# Altium PCB BEAGLEPLAYV020_220915.brd.PcbDoc (part 10 of 12)
Units mil, origin at the board's own origin, x right, y up, seen from the top; angles counter-clockwise.
Board outline 3149.7 x 3149.7 mil, 8 copper layers (TOP, LYR2_GND, LYR3, LAY4_PWR1, LAY5_PWR2, LAY6, LYR7_GND, BOTTOM), stack 60.84 mil thick; 782 components, 546 nets, 2864 pads, 2056 vias.
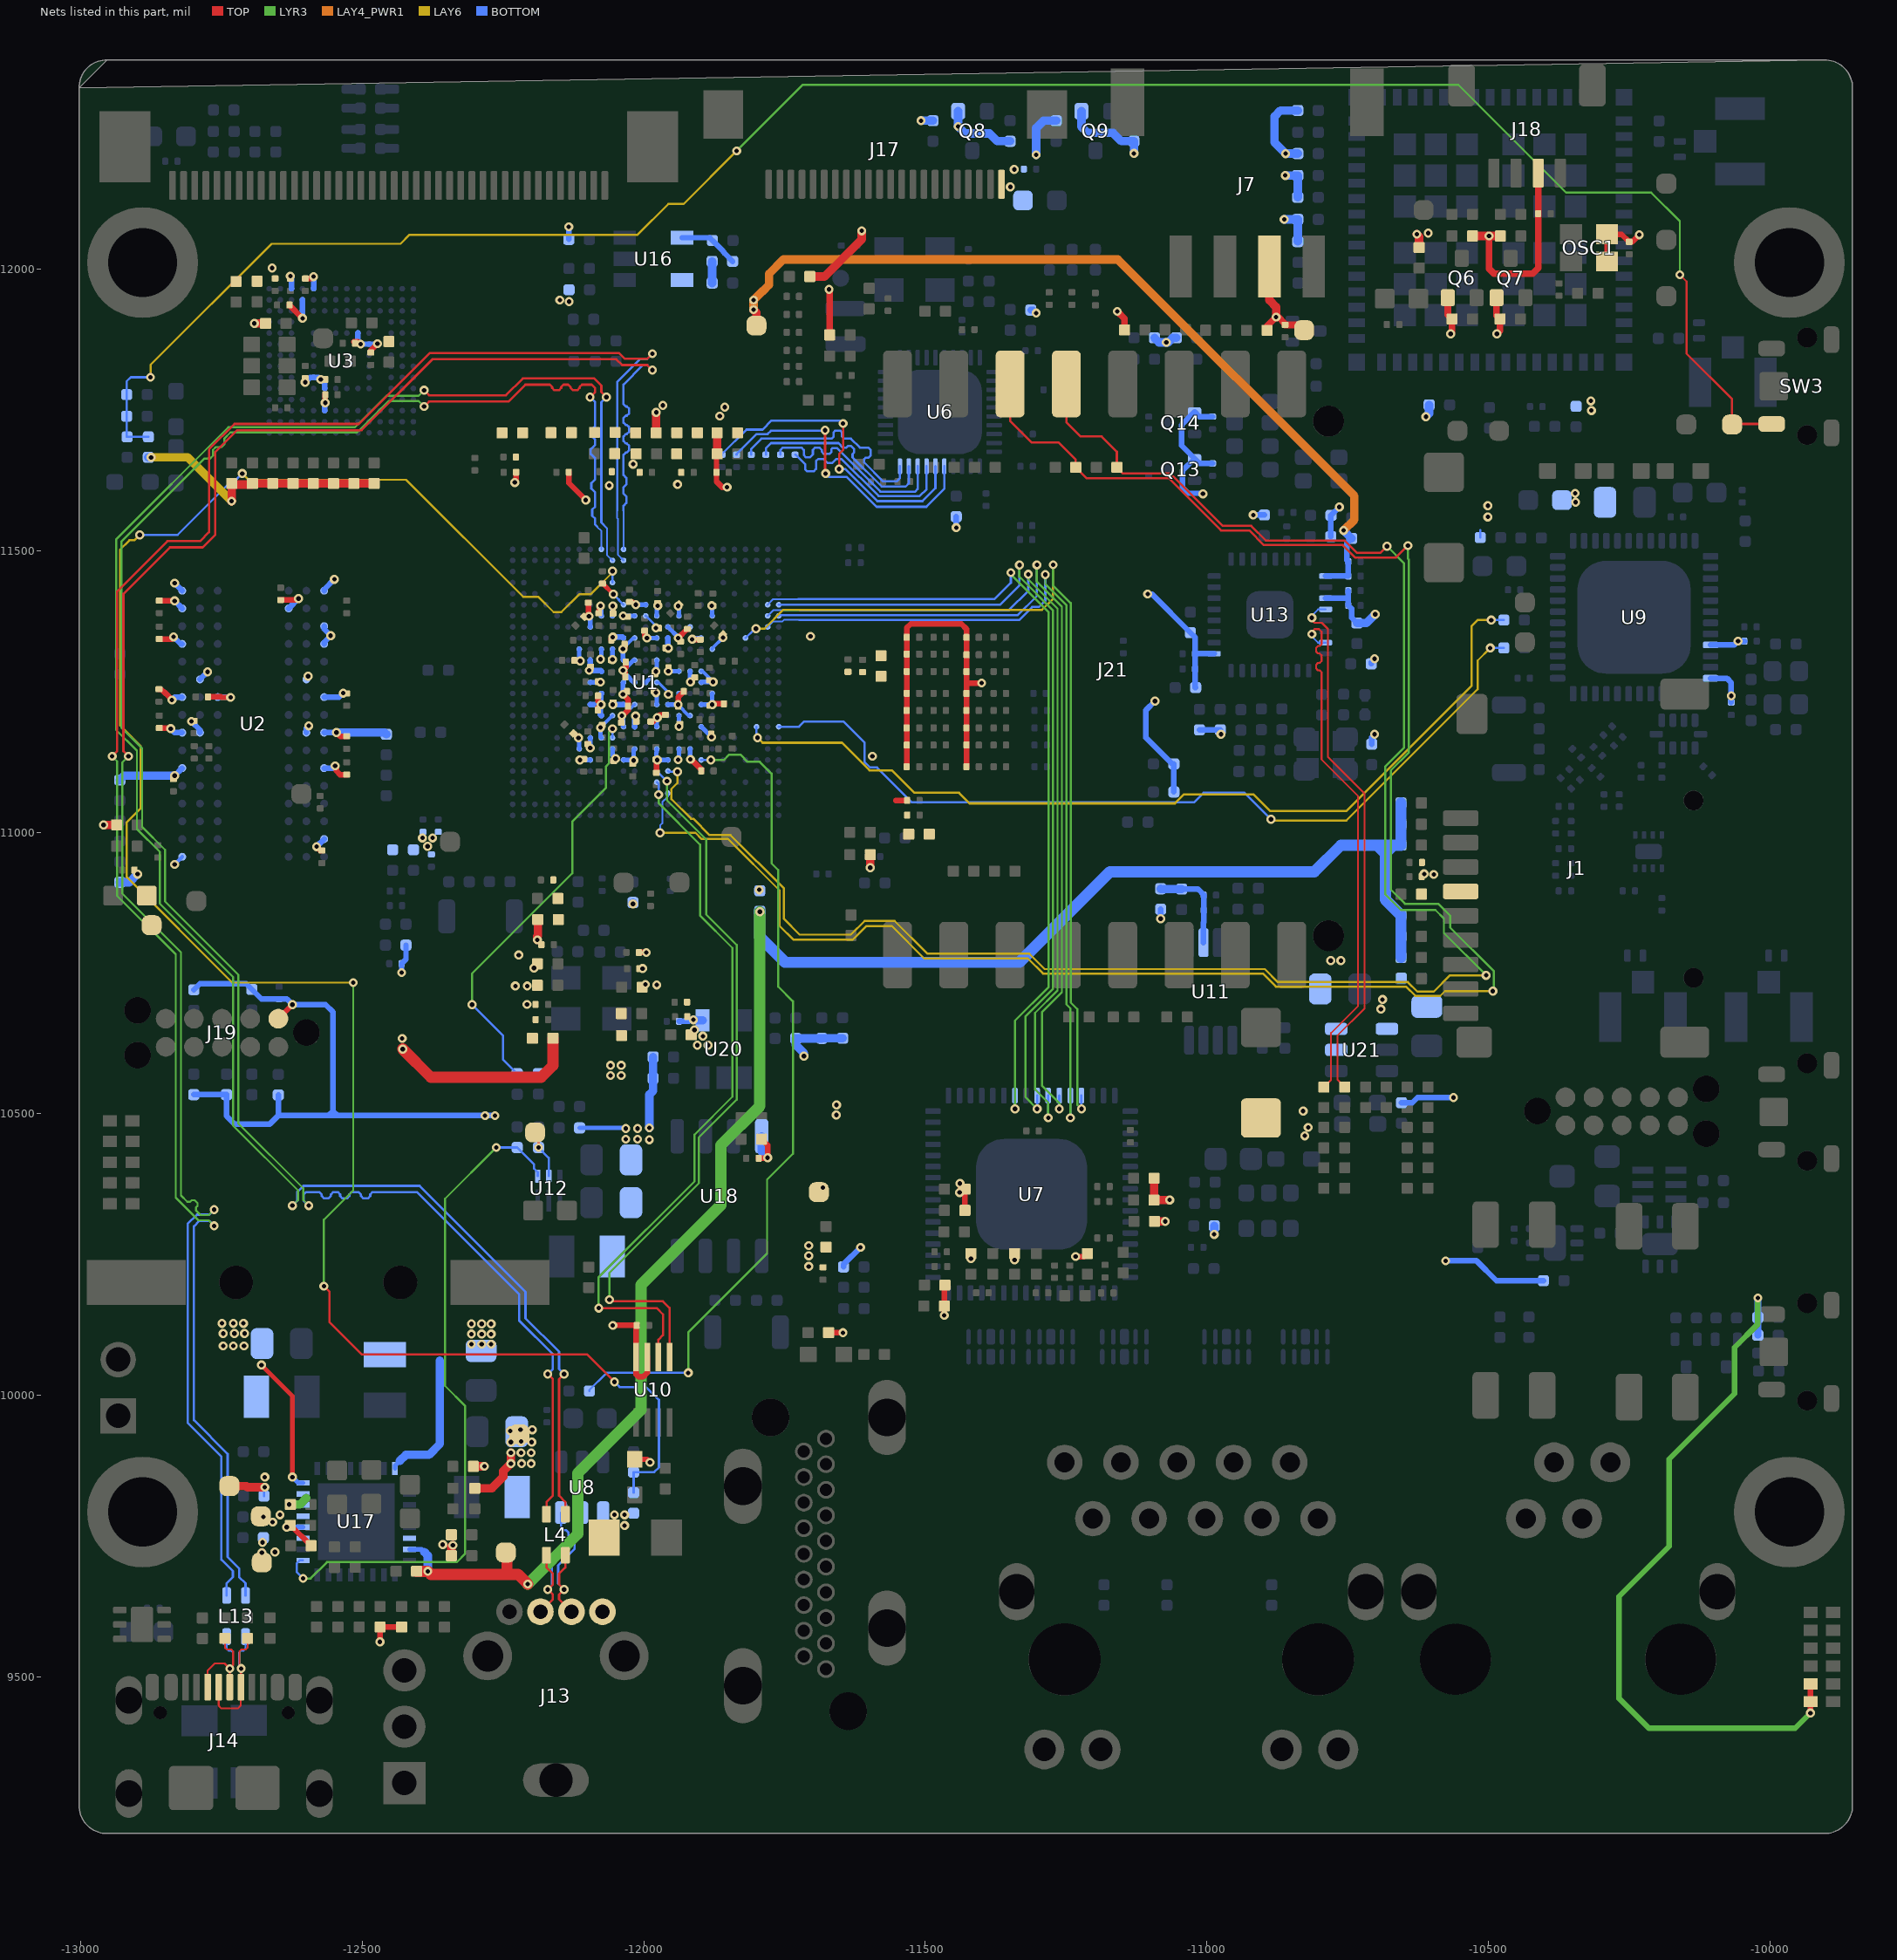
[diagram p16: the nets of this part, all layers, seen from the top]

## Via types
v1: diameter 16/0/16/0/0/0/0/16 (per signal layer), hole 8, TOP to BOTTOM, 334 vias
v2: diameter 16/16/0/0/0/0/16/16 (per signal layer), hole 8, TOP to BOTTOM, 282 vias
v3: diameter 16/0/0/0/0/16/0/16 (per signal layer), hole 8, TOP to BOTTOM, 255 vias
v4: diameter 16/16/0/0/0/16/16/16 (per signal layer), hole 8, TOP to BOTTOM, 253 vias
v5: diameter 16, hole 8, TOP to BOTTOM, 212 vias
v6: diameter 16/16/16/0/0/16/16/16 (per signal layer), hole 8, TOP to BOTTOM, 173 vias
v7: diameter 16/0/0/16/0/0/0/16 (per signal layer), hole 8, TOP to BOTTOM, 131 vias
v8: diameter 16/0/0/0/16/0/0/16 (per signal layer), hole 8, TOP to BOTTOM, 98 vias
v9: diameter 16/16/0/16/0/0/16/16 (per signal layer), hole 8, TOP to BOTTOM, 93 vias
v10: diameter 16/0/16/0/0/16/0/16 (per signal layer), hole 8, TOP to BOTTOM, 87 vias
v11: diameter 16/16/0/16/0/16/16/16 (per signal layer), hole 8, TOP to BOTTOM, 44 vias
v12: diameter 16/16/16/16/0/16/16/16 (per signal layer), hole 8, TOP to BOTTOM, 40 vias
v13: diameter 16/16/16/0/0/0/16/16 (per signal layer), hole 8, TOP to BOTTOM, 19 vias
v14: diameter 16/0/0/16/0/16/0/16 (per signal layer), hole 8, TOP to BOTTOM, 15 vias
v15: diameter 16/0/0/0/16/16/0/16 (per signal layer), hole 8, TOP to BOTTOM, 13 vias
v16: diameter 16/0/16/0/16/0/0/16 (per signal layer), hole 8, TOP to BOTTOM, 3 vias
v17: diameter 16/0/16/16/0/0/0/16 (per signal layer), hole 8, TOP to BOTTOM, 3 vias
v18: diameter 16/16/16/16/0/0/16/16 (per signal layer), hole 8, TOP to BOTTOM, 1 vias

## Nets (pads, with @x,y where several pads share a name; then routed paths per layer and width w, separated by ;. In a path a pad name is that pad's centre, name@x,y a point inside that pad or via, vN(x,y) a via of type N, cw(c..) or ccw(c..) an arc to the next point about the centre after c; other vN are vias at no path point) (continued)
TX_N: R101.1 U13.7 | length 942.3
  TOP w3.3: v5(-10813.48,11351.8) -10813.48,11355.8 -10808.63,11360.65 -10800.64,11360.65 -10796.3,11356.31 -10796.3,11334.01 -10799.6,11330.71 -10802.7,11330.71 -10806,11327.41 -10806,11320.81 -10802.7,11317.51 -10799.6,11317.51 -10796.3,11314.21 -10796.3,11303.97 -10799.6,11300.67 -10802.7,11300.67 -10806,11297.37 -10806,11290.77 -10802.7,11287.47 -10799.6,11287.47 -10796.3,11284.17 -10796.3,11129.31 -10731.3,11064.31 -10731.3,10691.69 -10779.39,10643.6 -10779.39,10570.38 ; R101.1@-10792.14,10547.53 -10779.36,10560.39 -10779.38,10570.37
  BOTTOM w3.3: v5(-10813.48,11351.8) -10813.48,11347.8 -10802.43,11336.75 U13.7@-10789,11336.75
TX_P: R100.1 U13.4 | length 937.7
  TOP w3.3: v5(-10813.48,11380.8) -10813.48,11376.8 -10808.63,11371.95 -10795.95,11371.95 -10785,11361 -10785,11134 -10720,11069 -10720,10687 -10768.09,10638.91 -10768.09,10575.38 -10768.06,10560.48 R100.1@-10755.14,10547.65
  BOTTOM w3.3: v5(-10813.48,11380.8) -10813.48,11384.8 -10802.43,11395.85 U13.4@-10789,11395.85
TXC: R49.2 U6.20 | length 389.7
  BOTTOM w4: R49.2@-11809.14,11670.46 -11809.14,11680.86 -11791,11699 -11666,11699 -11663,11702 -11663,11710 -11660.16,11712.84 -11650.84,11712.84 -11648,11710 -11648,11703 -11644,11699 -11632,11699 -11616,11683 -11601,11683 -11597,11679 -11597,11669 -11601,11665 -11606,11665 -11608.67,11662.33 -11608.67,11656.67 -11575,11623 -11551,11623 -11545,11629 U6.20@-11545,11649.96
TXCTL: R50.2 U6.19 | length 348.7
  BOTTOM w4: R50.2@-11783.14,11670.46 -11783.14,11681.86 -11774,11691 -11654.32,11691 -11646.15,11682.83 -11640.49,11682.83 -11637.49,11685.83 -11631.83,11685.83 -11626.17,11680.17 -11626.17,11674.51 -11629.17,11671.51 -11629.17,11665.85 -11577.32,11614 -11535,11614 -11529.25,11619.75 U6.19@-11529.25,11649.96
TXD0: R51.2 U6.18 | length 365.8
  BOTTOM w4: R51.2@-11757.14,11670.46 -11757.14,11679 -11753.14,11683 -11719.72,11683 -11715.72,11679 -11715.72,11669.84 -11711.71,11665.83 -11704.89,11665.83 -11699.72,11671 -11699.72,11679 -11695.72,11683 -11687.96,11683 -11684,11679.04 -11684,11676 -11680,11672 -11670,11672 -11667,11675 -11667,11680.04 -11665.04,11682 -11656.64,11682 -11579.64,11605 -11518,11605 -11513.5,11609.5 U6.18@-11513.5,11649.96
TXD1: R52.2 U6.17 | length 347.3
  BOTTOM w4: R52.2@-11731.14,11670.46 -11730.14,11670.46 -11713,11653.32 -11713,11644 -11710,11641 -11698,11641 -11694,11645 -11694,11659 -11690,11663 -11681,11663 -11674,11656 -11665,11656 -11658,11663 -11648.96,11663 -11582.96,11597 -11510,11597 -11497.75,11609.25 U6.17@-11497.75,11649.96
TXD2: R57.2 U6.16 | length 569.9
  TOP w4: v5(-11653,11645) -11653,11672 -11646,11679 v5(-11646,11726)
  BOTTOM w4: R57.2@-11861.14,11670.46 -11861.14,11671.46 -11817.6,11715 -11789,11715 -11773,11731 -11651,11731 v5(-11646,11726) ; v5(-11653,11645) -11642.28,11645 -11585.28,11588 -11505,11588 -11482,11611 U6.16@-11482,11649.96
TXD3: R58.2 U6.15 | length 541.7
  TOP w4: v5(-11678,11714) -11678,11638 v5(-11677,11637)
  BOTTOM w4: R58.2@-11835.14,11670.46 -11835.14,11671.46 -11799.6,11707 -11780,11707 -11774,11713 -11679,11713 v5(-11678,11714) ; v5(-11677,11637) -11671,11631 -11639.6,11631 -11586.6,11578 -11498.12,11578 -11466.26,11609.86 U6.15@-11466.26,11649.96
U18_FB: R211.2 R212.1 U16.4 | length 107.5
  BOTTOM w10: U16.4@-11931.84,12055.86 -11882.99,12055.86 R212.1@-11877.97,12050.84 -11877.84,12050.84 -11860,12033 -11855.71,12027.4 R211.2@-11842.15,12013.84
UART0_RXD: U1.D14 U10.6 | length 1285.7
  TOP w4: v1(-12080,10155) -11977,10155 -11966,10144 -11966,10107 -11974.08,10098.92 U10.6@-11974.08,10068.16
  LYR3 w3.8: v1(-12080,10155) -12080,10210 -11910,10380 -11910,10463 -11842.6,10530.4 -11842.6,10794.6 -11900,10852 -11900,10978.18 -11973.63,11051.81 v1(-11973.63,11066.7)
  BOTTOM w4: U1.D14@-11976.82,11089.04 -11973.63,11085.85 v1(-11973.63,11066.7)
UART0_TXD: U1.E14 U10.5 | length 1291.1
  TOP w4: v1(-12061,10170) -12058,10167 -11966,10167 -11954.38,10155.38 U10.5@-11954.38,10068.16
  LYR3 w3.8: v1(-12061,10170) -12061,10217.96 -11902.2,10376.76 -11902.2,10457.8 -11834.8,10525.2 -11834.8,10799.8 -11889,10854 -11889,10987 -11958.8,11056.8 v1(-11958.8,11090.7)
  BOTTOM w4: U1.E14@-11976.82,11108.72 v1(-11958.8,11090.7)
UART5_RXD: D38.2 J21.6 U1.C15 | length 3540.9
  TOP w4: J21.6@-11349.39,11796.09 -11349.39,11730.39 -11311,11692 -11263,11692 -11232.79,11661.79 D38.2@-11232.79,11648 -11213.79,11629 -11068,11629 -10975,11536 -10924.68,11536 -10898.68,11510 -10758.68,11510 -10736.68,11488 -10664,11488 v1(-10643,11509)
  LYR3 w3.8: v1(-10643,11509) -10643,11486 -10641,11484 -10641,11142 -10673,11110 -10673,10898 -10648,10873 -10589,10873 -10568,10852 -10568,10831 -10490.1,10753.1 -10490.1,10719.9 v10(-10492,10718)
  LAY6 w3.8: v3(-11971,10999) -11908,10999 -11897,10988 -11849.96,10988 -11758.86,10896.9 -11758.86,10833.86 -11734,10809 -11629,10809 -11605,10833 -11559,10833 -11502,10776 -11318,10776 -11291,10749 -10900.32,10749 -10877.32,10726 -10646.08,10726 -10629.48,10709.4 -10585.6,10709.4 -10577,10718 v10(-10492,10718)
  BOTTOM w3.2: v3(-11971,10999) -11971,11012 -11967,11016 -11967,11053.65 -11957.13,11063.52 U1.C15@-11957.13,11069.35
UART5_TXD: D39.2 J21.5 U1.E15 | length 3375.7
  TOP w4: J21.5@-11249.39,11796.09 -11249.39,11728.4 -11223.99,11703 -11187,11703 -11159.79,11675.79 D39.2@-11159.79,11648 -11148.79,11637 -11064.68,11637 -10971.68,11544 -10921.36,11544 -10895.36,11518 -10755.36,11518 -10733.36,11496 -10692,11496 v1(-10680,11508)
  LYR3 w3.8: v1(-10680,11508) -10650,11478 -10650,11149.96 -10683.48,11116.48 -10683.48,10890.48 -10655,10862 -10594,10862 -10579,10847 -10579,10821 v10(-10504,10746)
  LAY6 w3.8: v3(-11940.2,11107.5) -11940.2,11087.5 -11951,11076.7 -11951,11059 -11916,11024 -11912,11024 -11883,10995 -11845.92,10995 -11751.06,10900.14 -11751.06,10846.06 -11723.2,10818.2 -11632.11,10818.2 -11607.76,10842.55 -11554.55,10842.55 -11496.2,10784.2 -11315.16,10784.2 -11287.96,10757 -10897,10757 -10874,10734 -10643.04,10734 -10626.24,10717.2 -10596.8,10717.2 -10568,10746 v10(-10504,10746)
  BOTTOM w4: U1.E15@-11957.13,11108.72 -11955.91,11107.5 v3(-11940.2,11107.5)
UART6_RXD: R121.1 U1.J23 | length 1615.4
  LAY6 w4: v3(-11798,11168) -11789,11159 -11648,11159 -11599,11110 -11559.3,11110 -11519.46,11070.16 -11440.18,11070.16 -11421.32,11051.3 -11056.7,11051.3 -11041,11067 -10917,11067 -10887.5,11037.5 -10752.5,11037.5 -10529.64,11260.36 -10529.64,11366.36 -10519.16,11376.84 v3(-10495,11376.84)
  BOTTOM w4: U1.J23@-11799.65,11187.46 -11799.65,11169.65 v3(-11798,11168) ; v3(-10495,11376.84) R121.1@-10472.47,11376.84
UART6_TXD: R120.1 U1.J25 | length 1555.3
  LAY6 w3.8: v3(-10886,11023) -10884,11021 -10752,11021 -10519,11254 -10519,11305 v3(-10496.72,11327.28)
  BOTTOM w4: U1.J25@-11760.28,11187.46 -11724.35,11187.46 -11715.18,11196.63 -11645.15,11196.63 -11608,11159.48 -11608,11125.2 -11597.8,11115 -11585.78,11115 -11523.78,11053 -11023,11053 -11006,11070 -10933,11070 v3(-10886,11023) ; v3(-10496.72,11327.28) R120.1@-10472.43,11327.28
USB0_DM: L13.1 U1.AE11 | length 3574.7
  TOP w4.1: v1(-12915.2,11135) -12924.1,11143.9 -12924.1,11423.2 -12841.37,11505.93 -12783.37,11505.93 -12761,11528.3 -12761,11675.3 -12722.3,11714 -12501.3,11714 -12375.4,11839.9 -12048.6,11839.9 -12038.4,11829.7 -11993.7,11829.7 v5(-11984.8,11820.8)
  LYR3 w3.6: v1(-12915.2,11135) -12926,11124.2 -12926,10891 -12822,10787 -12822,10355.16 -12810.67,10343.83 -12805.57,10343.83 -12802.75,10346.65 -12797.65,10346.65 -12792.56,10341.56 -12792.56,10336.46 -12795.38,10333.64 -12795.38,10328.54 -12787.04,10320.2 -12772.8,10320.2 v1(-12763,10330)
  BOTTOM w3.2: -12036.1,11571.54 -12036.1,11560.38 -12035.87,11560.15 U1.AE11@-12035.87,11502.42
  BOTTOM w4.1: v1(-12763,10330) -12771.9,10321.1 -12793.6,10321.1 -12810.1,10304.6 -12810.1,9951.4 -12750.1,9891.4 -12750.1,9708.4 -12729.62,9687.92 -12729.62,9677.52 -12740.8,9666.34 L13.1@-12740.8,9644.53 ; -12036.1,11571.54 -12036.1,11579.88 -12031,11584.98 -12031,11596.28 -12036.1,11601.38 -12036.1,11612.68 -12031,11617.78 -12031,11629.08 -12036.1,11634.18 -12036.1,11670.11 -12032,11674.21 -12030.1,11674.21 -12026,11678.31 -12026,11686.51 -12030.1,11690.61 -12032,11690.61 -12036.1,11694.71 -12036.1,11702.91 -12032,11707.01 -12030.1,11707.01 -12026,11711.11 -12026,11719.31 -12030.1,11723.41 -12032,11723.41 -12036.1,11727.51 -12036.1,11735.71 -12032,11739.81 -12030.1,11739.81 -12026,11743.91 -12026,11752.11 -12030.1,11756.21 -12032,11756.21 -12036.1,11760.31 -12036.1,11795.2 -12001.6,11829.7 -11993.7,11829.7 v5(-11984.8,11820.8)
USB0_DP: L13.4 U1.AD11 | length 3577.8
  TOP w4.1: v1(-12944.1,11135) -12935.2,11143.9 -12935.2,11427.8 -12845.97,11517.03 -12787.97,11517.03 -12772.1,11532.9 -12772.1,11679.9 -12726.9,11725.1 -12505.9,11725.1 -12380,11851 -12044,11851 -12033.8,11840.8 -11993.7,11840.8 v5(-11984.8,11849.7)
  LYR3 w3.6: v1(-12944.1,11135) -12935.3,11126.2 -12935.3,10887.14 -12831.3,10783.14 -12831.3,10351.3 -12790.9,10310.9 -12772.8,10310.9 v1(-12763,10301.1)
  BOTTOM w3.2: -12047.2,11571.54 -12047.2,11557.71 -12045.76,11556.26 -12045.76,11492.63 U1.AD11@-12035.87,11482.74
  BOTTOM w4.1: v1(-12763,10301.1) -12771.9,10310 -12789,10310 -12799,10300 -12799,9956 -12739,9896 -12739,9713 -12718.52,9692.52 -12718.52,9677.52 -12707.34,9666.34 L13.4@-12707.34,9644.53 ; -12047.2,11571.54 -12047.2,11799.8 -12006.2,11840.8 -11993.7,11840.8 v5(-11984.8,11849.7)
USB1_DM: L4.1 U1.AD10 | length 3586.8
  TOP w4.1: v1(-12390,11784.9) -12381.1,11776 -12245,11776 -12215,11806 -12088,11806 -12075.35,11793.35 -12075.35,11781.6 v5(-12066.45,11772.7) ; v5(-12141.55,10038) -12150.45,10029.1 -12150.45,9822.09 -12139.27,9810.91 L4.1@-12139.27,9789.1
  LYR3 w3.6: v1(-12623.9,10337) -12614.1,10346.8 -12614.1,10363.94 -12729.3,10479.14 -12729.3,10743.14 -12859.3,10873.14 -12859.3,10965.14 -12900,11005.84 -12900,11144.84 -12937.1,11181.94 -12937.1,11520.06 -12737.86,11719.3 -12512.86,11719.3 -12457.06,11775.1 -12399.8,11775.1 v1(-12390,11784.9)
  BOTTOM w3.2: -12075.35,11550.05 -12065.36,11540.06 -12065.36,11492.54 U1.AD10@-12055.56,11482.74
  BOTTOM w4.1: v1(-12623.9,10337) -12615,10345.9 -12615,10361.4 -12604.4,10372 -12398,10372 -12210,10184 -12210,10137 -12150.45,10077.45 -12150.45,10046.9 v5(-12141.55,10038) ; -12075.35,11550.05 -12075.35,11763.8 v5(-12066.45,11772.7)
USB1_DP: L4.4 U1.AE9 | length 3583.8
  TOP w4.1: v1(-12390,11756) -12381.1,11764.9 -12240.4,11764.9 -12210.4,11794.9 -12166.99,11794.9 -12162.89,11790.8 -12162.89,11789.1 -12158.79,11785 -12150.59,11785 -12146.49,11789.1 -12146.49,11790.8 -12142.39,11794.9 -12134.19,11794.9 -12130.09,11790.8 -12130.09,11789.1 -12125.99,11785 -12117.79,11785 -12113.69,11789.1 -12113.69,11790.8 -12109.59,11794.9 -12092.6,11794.9 -12086.45,11788.75 -12086.45,11781.6 v5(-12095.35,11772.7) ; L4.4@-12172.73,9789.1 -12172.73,9810.91 -12161.55,9822.09 -12161.55,10029.1 v5(-12170.45,10038)
  LYR3 w3.6: v1(-12595,10337) -12604.8,10346.8 -12604.8,10367.8 -12720,10483 -12720,10747 -12850,10877 -12850,10969 -12890.7,11009.7 -12890.7,11148.7 -12927.8,11185.8 -12927.8,11516.2 -12780.21,11663.79 -12770.21,11663.79 -12765.02,11668.98 -12765.02,11678.98 -12759.83,11684.17 -12749.83,11684.17 -12744.64,11689.36 -12744.64,11699.36 -12734,11710 -12509,11710 -12453.2,11765.8 -12399.8,11765.8 v1(-12390,11756)
  BOTTOM w3.2: -12082.45,11542.56 -12082.45,11542.14 -12075.18,11534.87 -12075.18,11521.83 -12075.24,11520.46 U1.AE9@-12075.24,11502.42
  BOTTOM w4.1: v1(-12595,10337) -12603.9,10345.9 -12603.9,10356.8 -12599.8,10360.9 -12576.18,10360.9 -12572.08,10356.8 -12572.08,10354.1 -12567.98,10350 -12559.78,10350 -12555.68,10354.1 -12555.68,10356.8 -12551.58,10360.9 -12543.38,10360.9 -12539.28,10356.8 -12539.28,10354.1 -12535.18,10350 -12526.98,10350 -12522.88,10354.1 -12522.88,10356.8 -12518.78,10360.9 -12506.35,10360.9 -12502.25,10356.8 -12502.25,10354.1 -12498.15,10350 -12489.95,10350 -12485.85,10354.1 -12485.85,10356.8 -12481.75,10360.9 -12402.6,10360.9 -12221.1,10179.4 -12221.1,10132.4 -12161.55,10072.85 -12161.55,10046.9 v5(-12170.45,10038) ; v5(-12095.35,11772.7) -12086.45,11763.8 -12086.45,11720.91 -12094,11713.36 -12094,11704.51 -12086.45,11696.96 -12086.45,11688.11 -12094,11680.56 -12094,11671.71 -12086.45,11664.16 -12086.45,11626.6 -12093,11620.05 -12093,11610.2 -12086.45,11603.65 -12086.45,11578.12 -12091.45,11573.12 -12091.45,11561.72 -12086.45,11556.72 -12086.45,11546.56 -12082.45,11542.56
USB1_DRVVBUS: R133.1 U1.F18 | length 1489.6
  LYR3 w3.8: v1(-11921,10040) -11921,10112 -11781,10252 -11781,10383.31 -11735.2,10429.11 -11735.2,10699.89 -11761.2,10725.9 -11761.2,10932.89 -11773.2,10944.89 -11773.2,11104.25
  LYR3 w4: v1(-11881,11128.4) -11857.6,11128.4 -11848,11138 -11828.5,11138 -11815.5,11125 -11793.95,11125 -11773.2,11104.25
  BOTTOM w4: R133.1@-12096.59,10007.86 -12096.59,10009.41 -12066,10040 v1(-11921,10040) ; U1.F18@-11898.08,11128.4 v1(-11881,11128.4)
USB1_VBUS: R136.1 R152.1 U1.AB10 | length 3646.8
  TOP w4: v1(-12568,10194) -12558.45,10184.45 -12558.45,10130.45 -12501,10073 -12101,10073 v5(-12052,10024)
  LYR3 w3.8: v1(-12568,10194) -12568,10312 -12516,10364 v10(-12516,10733)
  LAY6 w3.8: v3(-12895,11528) -12904.48,11518.52 -12913.48,11518.52 -12930,11502 -12930,11189.84 -12893.4,11153.24 -12893.4,11042.6 -12918.2,11017.8 -12918.2,10920.28 -12730.92,10733 v10(-12516,10733) ; v3(-12713,11637) -12702,11626 -12422,11626 -12214.35,11418.35 -12187.58,11418.35 -12160.13,11390.9 -12146.25,11390.9 -12114.15,11423 -12094,11423 -12055.55,11461.45 v3(-12055.55,11463.68)
  BOTTOM w4: v3(-12895,11528) -12828,11528 -12728.55,11627.45 -12722.55,11627.45 v3(-12713,11637) ; U1.AB10@-12055.56,11443.36 v3(-12055.55,11463.68) ; v5(-12052,10024) -12043,10015 -11996,10015 -11973,9992 -11973,9872 -11981.21,9863.79 R152.1@-12018,9863.79 R136.1@-12018,9827.21
USB_A_5V: C110.1 J13.1 R136.2 U8.4
  other v5: -12034,9769 -12052,9788 -12034,9788
USB_A_DM: J13.2 L4.2 U8.5 | length 282.6
  TOP w4.1: L4.2@-12139.27,9716.26 -12139.27,9694.44 -12150.45,9683.26 -12150.45,9664.31 v5(-12141.55,9655.41) -12150.45,9646.51 -12150.45,9638.01 J13.2@-12128.44,9616
  BOTTOM w4.1: v5(-12141.55,9655.41) -12151.9,9665.76 -12151.9,9698.4 -12122.65,9727.65 -12122.65,9756.62 -12118.55,9760.72 -12113.6,9760.72 -12109.5,9764.82 U8.5@-12109.5,9791.87
USB_A_DP: J13.3 L4.3 U8.6 | length 281.4
  TOP w4.1: J13.3@-12183.56,9616 -12161.55,9638.01 -12161.55,9646.51 v5(-12170.45,9655.41) -12161.55,9664.31 -12161.55,9683.26 -12172.73,9694.44 L4.3@-12172.73,9716.26
  BOTTOM w4.1: v5(-12170.45,9655.41) -12163,9662.86 -12163,9703 -12133.75,9732.25 -12133.75,9756.62 -12137.85,9760.72 -12142.8,9760.72 -12146.9,9764.82 U8.6@-12146.9,9791.87
USB_C_DM: D25.2 J14.A7 J14.B7 L13.2 | length 243.8
  TOP w3.3: J14.B7@-12774.53,9481.97 -12774.53,9511.47 -12761.85,9524.15 -12744.47,9524.15 v5(-12735.16,9514.84) ; D25.2@-12743.66,9568.51 -12743.64,9552 -12740.35,9548.71 -12732.58,9548.73 -12729.28,9545.42 -12729.28,9520.72 v5(-12735.16,9514.84) ; J14.A7@-12735.16,9481.97 v5(-12735.16,9514.84)
  BOTTOM w3.3: L13.2@-12740.8,9571.69 -12740.8,9550.27 -12737.5,9546.97 -12733.02,9546.97 -12729.72,9543.67 -12729.72,9520.28 v5(-12735.16,9514.84)
USB_C_DP: D24.2 J14.A6 J14.B6 L13.3 | length 273
  TOP w3.3: J14.A6@-12754.84,9481.97 -12754.84,9448.84 -12750,9444 -12721,9444 -12716,9449 -12716,9481.44 J14.B6@-12715.47,9481.97 -12715.47,9514.53 v5(-12715,9515) -12717.98,9517.98 -12717.98,9545.44 -12714.7,9548.73 -12706.94,9548.75 -12703.64,9552.05 D24.2@-12703.66,9568.55
  BOTTOM w3.3: v5(-12715,9515) -12718.42,9518.42 -12718.42,9543.67 -12715.12,9546.97 -12710.64,9546.97 -12707.34,9550.27 L13.3@-12707.34,9571.69
USER_BTN: R53.1 R168.2 R184.1 R185.1 SW3.2 TP17.1 | length 3696.4
  TOP w4: v1(-10160,11990) -10148,11978 -10148,11850 -10067.19,11769.19 TP17.1@-10067.19,11724.11 -10066.23,11725.07 SW3.2@-9996.99,11725.07
  LYR3 w3.8: v10(-11835,12210) -11718,12327 -10553,12327 -10362,12136 -10211,12136 -10160,12085 v1(-10160,11990)
  LAY6 w3.8: v3(-12876,11808) -12876,11830 -12661,12045 -12432,12045 -12416,12061 -12011.04,12061 -11956.24,12115.8 -11929.2,12115.8 v10(-11835,12210)
  BOTTOM w4: R168.2@-12879.84,11702.13 R184.1@-12917.56,11702.13 -12918.03,11702.13 -12918.45,11702.55 -12918.45,11716.05 -12918.29,11716.21 R185.1@-12918.29,11738.84 R53.1@-12918.29,11777.2 -12918.29,11800.72 -12911.01,11808 v3(-12876,11808)
VDD_1V0: C9.1 C10.1 C11.1 C263.1 R211.1 TP27.1 U13.1 U16.5 | length 1571.2
  TOP w15: v7(-11805,11928) -11799.82,11922.82 TP27.1@-11799.82,11899.69
  LAY4_PWR1 w15: v7(-11805,11928) v7(-11805,11945) -11789.5,11960.5 -11788.92,11960.5 -11777.5,11971.92 -11777.5,11991.5 -11752,12017 -11158,12017 -10738,11597 -10738,11555 v7(-10757,11536)
  BOTTOM w4: C11.1@-10742.66,11521.79 C11.1@-10740.21,11521.79
  BOTTOM w10: U13.1@-10789,11454.95 C10.1@-10748.8,11454.95 C9.1@-10748.8,11480.66 -10751,11482.86 -10751,11513.45 C11.1@-10742.66,11521.79
  BOTTOM w15: C263.1@-11878.53,11975.36 -11878.57,11975.4 R211.1@-11878.57,12013.84 ; v7(-10757,11536) -10742.79,11521.79 C11.1@-10742.66,11521.79
VDD_1V2: C54.1 C81.1 C82.2 C99.1 C100.1 C101.1 C102.1 C109.1 C114.1 C115.1 C116.1 C117.1 C118.1 C119.1 C120.1 C121.1 C224.1 C225.1 C226.1 C227.1 C228.1 C229.1 C230.1 C231.1 C237.1 C244.1 C245.1 FB18.2 FB19.2 FB22.2 FB23.2 L17.2 R4.1 R81.1 R84.1 R86.1 TP21.1 U1.K9 U1.L8 U1.M9 U1.P9 U1.R8 U2.A1 U2.A9 U2.B3 U2.B9 U2.C1 U2.D1 U2.D9 U2.F2 U2.F8 U2.G1 U2.G7 U2.G9 U2.J1 U2.J2 U2.J8 U2.J9 U2.L1 U2.L9 U2.R1 U2.T9 U17.24 | length 1430.9
  TOP w8: v5(-12679,10054) -12624,9999 v5(-12624,9855) ; C237.1@-11438.52,10360.82 v1(-11438.52,10376.27)
  TOP w10: C115.1@-12861,11254 -12857.02,11254 -12851.87,11248.85 -12851.22,11248.85 -12843.4,11241.03 -12843.4,11240.38 v8(-12838.01,11234.99) ; C100.1@-12860.34,11185.16 -12841.16,11185.16 v8(-12840,11184) ; C81.1@-12860.34,11343.2 -12838.8,11343.2 v8(-12835,11347) ; C102.1@-12860.34,11411.24 -12833.45,11411.24 v8(-12833.1,11410.89) ; C119.1@-12774,11240.36 -12751.09,11240.36 -12750.23,11239.5 v8(-12733.73,11239.5) ; C114.1@-12644.86,11412.32 -12615.79,11412.32 v8(-12613.06,11415.05) ; v8(-12581.1,10974.51) -12574.09,10967.5 C117.1@-12571.66,10967.5 ; v8(-12548,11118) -12546,11116 -12546,11109 -12539.4,11102.4 C99.1@-12527.66,11102.4 ; v8(-12545.91,11177.15) -12539.16,11170.4 C120.1@-12527.66,11170.4 ; v8(-12096.9,11287.65) -12094.34,11290.21 C226.1@-12094.34,11293.85 ; C228.1@-12081.71,11217.05 -12081.71,11221 v8(-12075.88,11226.83) -12081.15,11232.1 C227.1@-12081.15,11242.36 ; v1(-11439.07,10360.27) -11438.52,10360.82 -11433.07,10366.27 C237.1@-11429.52,10366.27 FB18.2@-11429.52,10328.6 ; v1(-11418.8,10243) FB19.2@-11418.8,10251.87 ; v1(-11341.34,10240.66) FB23.2@-11341.34,10251.87 ; v1(-11233.14,10246.77) -11232.98,10246.77 -11232.21,10246 -11218.14,10246 FB22.2@-11212.27,10251.87
  BOTTOM w6: v8(-12096.9,11287.65) v8@-12096.55,11287.3
  BOTTOM w6.6: v8(-12833.1,10943.01) U2.T9@-12819.66,10956.45
  BOTTOM w8: v5(-12624,9855) -12613.7,9844.7 U17.24@-12605.18,9844.7 ; v8@-12076.4,11227.35 v8(-12075.88,11226.83)
  BOTTOM w10: v8(-12840,11184) -12832.95,11176.95 U2.J9@-12819.66,11176.95 ; v8(-12838.01,11234.99) -12833.05,11239.95 U2.G9@-12819.66,11239.95 ; v8(-12835,11347) -12822.45,11334.45 U2.D9@-12819.66,11334.45 ; v8(-12833.1,11100.51) U2.L9@-12819.66,11113.95 ; v8(-12833.1,11410.89) U2.B9@-12819.66,11397.45 ; v8(-12833.1,11442.39) U2.A9@-12819.66,11428.95 ; v8(-12803.21,11196.84) -12788.16,11181.79 U2.J8@-12788.16,11176.95 ; U2.F8@-12788.16,11271.45 v8(-12774.72,11284.89) ; U2.G7@-12756.66,11239.95 -12734.18,11239.95 v8(-12733.73,11239.5) ; U2.B3@-12630.66,11397.45 v8(-12613.06,11415.05) ; U2.J2@-12599.16,11176.95 -12599.16,11184.84 v8(-12595,11189) ; v8(-12581.1,10974.51) U2.R1@-12567.66,10987.95 ; U2.L1@-12567.66,11113.95 -12552.05,11113.95 v8(-12548,11118) ; U2.J1@-12567.66,11176.95 -12546.11,11176.95 v8(-12545.91,11177.15) ; U2.G1@-12567.66,11239.95 -12541.03,11239.95 v8(-12533.85,11247.13) ; U2.D1@-12567.66,11334.45 -12567.66,11337.34 v8(-12556,11349) -12567.66,11360.66 U2.C1@-12567.66,11365.95 ; U2.A1@-12567.66,11428.95 -12567.66,11431.04 v8(-12549.45,11449.25) ; v8(-12430,10750.7) C121.1@-12430,10766.7 -12422.27,10774.43 R86.1@-12422.27,10799.56 ; v8(-12096.9,11287.65) -12094.92,11289.63 U1.R8@-12094.92,11305.57 ; v8@-12096.55,11287.3 -12076.66,11287.3 U1.P9@-12075.24,11285.88 ; U1.L8@-12094.92,11226.83 v8@-12076.92,11226.83 ; U1.K9@-12075.24,11207.14 -12076.92,11208.82 v8@-12076.92,11226.83 ; U1.M9@-12075.24,11246.52 -12076.4,11245.36 -12076.4,11227.35 v8@-12076.92,11226.83
  BOTTOM w15: R4.1@-12930.44,10911.27 -12913.43,10911.27 v5(-12899,10925.7) ; R81.1@-12930.44,11092.81 -12922.74,11100.51 v8(-12833.1,11100.51) ; v8(-12545.91,11177.15) -12460.38,11177.15 R84.1@-12457.16,11173.93
  other v8: -12384,10975 -12393,10990 -12375,10990 -12596,11277
  other v10: -11707,10229 -11707,10248 -11707,10266
  other v15: -12747,10088 -12729,10088 -12710,10088 -12747,10110 -12727,10110 -12709,10110 -12749,10128 -12729,10128 -12711,10128
VDD_1V8: C6.1 C7.1 C8.1 C60.1 C70.1 C71.1 C72.1 C73.1 C74.1 C75.1 C87.1 C104.1 C112.1 C214.1 C215.1 C216.1 C217.1 C218.1 C219.1 C220.1 C221.1 C222.1 C223.1 C260.1 C270.1 C273.1 FB2.1 FB20.2 FL2.1 J19.1 L16.2 OSC1.1 OSC1.4 Q6.1 Q7.1 Q8.1 Q9.1 Q13.1 Q14.1 R5.1 R6.1 R7.1 R8.1 R9.1 R10.1 R11.1 R12.1 R13.1 R14.1 R18.2 R19.2 R23.1 R24.1 R25.1 R26.1 R27.1 R32.2 R36.1 R90.1 R92.1 R110.1 R111.1 R112.2 R113.2 R114.2 R115.2 R116.2 R126.1 R146.1 R150.1 R151.1 R154.1 R155.1 R156.1 R157.1 R159.1 R168.1 R170.1 R171.1 R172.1 R173.1 R174.1 R175.1 R176.1 R177.1 R178.1 R179.1 R180.1 R181.1 R182.1 R183.1 R186.1 R207.1 R210.1 R226.1 R232.1 R233.1 R234.1 R235.1 R257.1 R259.1 R263.1 TP20.1 U1.F11 U1.G10 U1.G12 U1.J18 U1.N18 U1.P18 U1.T7 U1.T19 U1.U18 U1.W16 U1.W19 U3.C6 U3.M4 U3.N4 U3.P3 U3.P5 U13.17 U17.20 U17.32 | length 5200.1
  TOP w10: J19.1@-12649,10669 v5(-12624,10694) ; C74.1@-12629.2,11936.36 -12629.2,11935.88 v7(-12606.02,11912.7) ; C112.1@-12627.69,9769.34 -12627.13,9769.34 R159.1@-12590.79,9733 ; C70.1@-12627.66,11983.34 v7(-12627.66,11987.7) ; C72.1@-12601,11983.34 -12589.69,11983.34 v7(-12586.33,11986.7) ; v7(-12565.72,11762.7) C73.1@-12565.72,11777.04 ; C273.1@-12123,11305.17 -12113.83,11305.17 v1(-12112.91,11304.25) ; C216.1@-12053.34,11126.85 -12053.34,11127.36 v7(-12050,11130.7) ; C221.1@-12019.66,11121.55 -12019.66,11125.79 v7(-12017.79,11127.66) ; C270.1@-12008.72,10786.52 v7(-11995.48,10786.52) ; v17(-11914,11342.7) -11913.46,11342.16 C217.1@-11899.66,11342.16 ; C222.1@-11859.47,11351.51 -11859.47,11345.66 v17(-11859.4,11345.59) ; R182.1@-11532.9,11116.36 R177.1@-11532.9,11154.86 R176.1@-11532.9,11185.26 R178.1@-11532.9,11216.26 R174.1@-11532.9,11246.64 R172.1@-11532.9,11285.3 R171.1@-11532.9,11316.3 R90.1@-11532.9,11346.3 -11533.08,11346.48 -11533.08,11362.92 -11526,11370 -11436,11370 -11426.96,11360.96 R92.1@-11426.96,11346.1 R170.1@-11426.96,11315.3 R173.1@-11426.96,11285.3 -11426.96,11265 ; v3(-11466.31,10141.97) C104.1@-11466.31,10158.68 -11466.31,10194.92 FB20.2@-11465.11,10196.12 ; R183.1@-11426.96,11116.36 R180.1@-11426.96,11154.86 R181.1@-11426.96,11185.26 R179.1@-11426.96,11216.26 R175.1@-11426.96,11246.64 -11426.96,11265 ; v7(-11400,11265) -11426.96,11265 ; OSC1.4@-10289.31,12013.59 OSC1.1@-10289.31,12061.81 -10263.31,12061.81 C87.1@-10249.96,12048.46 -10244.54,12048.46 v7(-10232,12061)
  TOP w12: Q6.1@-10572.15,11949.2 -10572.15,11919.16 R186.1@-10564.55,11911.56 -10564.55,11887.45 v7(-10567,11885) ; Q7.1@-10485.5,11949.2 -10485.5,11917.75 R226.1@-10479.31,11911.56 -10479.31,11890.69 v7(-10485,11885)
  TOP w15: v3(-12732,11588.01) -12731.86,11588.15 R9.1@-12731.86,11619.37 -12729.99,11617.5 -12696.73,11617.5 R8.1@-12694.86,11619.37 R12.1@-12658.86,11619.37 R11.1@-12622.86,11619.37 R7.1@-12586.86,11619.37 R10.1@-12550.86,11619.37 R6.1@-12514.86,11619.37 R5.1@-12478.86,11619.37 ; v7(-12691.56,11903.56) R14.1@-12671.57,11903.56 ; R32.2@-11705,11986.89 -11679.11,11986.89 -11613,12053 v7(-11613,12068) ; R257.1@-11092.99,10309 v3(-11074,10309)
  LAY6 w15: v14(-12875,11665.71) -12809.7,11665.71 v3(-12732,11588.01)
  BOTTOM w6: U1.P18@-11898.08,11285.88 -11895.56,11285.88 v7(-11876.79,11267.11) ; U1.T19@-11878.39,11325.26 -11878.39,11326.6 v17(-11859.4,11345.59)
  BOTTOM w8: v3(-12633.96,9765.96) U17.20@-12605.18,9765.96 ; U17.32@-12441.79,9870.29 -12441.79,9875.21 -12433,9884 ; U1.T7@-12114.61,11325.26 -12114.61,11305.95 v1(-12112.91,11304.25) ; U1.G10@-12055.56,11148.09 -12055.56,11136.26 v7(-12050,11130.7) ; U1.F11@-12035.87,11128.4 -12018.53,11128.4 v7(-12017.79,11127.66) -12017.79,11146.48 U1.G12@-12016.18,11148.09 ; v7(-11939,11401.7) -11937.44,11400.14 U1.W16@-11937.44,11384.31 ; v17(-11914,11342.7) -11911.76,11344.94 U1.U18@-11898.08,11344.94 ; U1.J18@-11898.08,11187.46 v7(-11879.73,11169.11) ; U1.N18@-11898.08,11266.2 -11897.17,11267.11 v7(-11876.79,11267.11) ; v7(-11879.23,11402.31) -11878.39,11401.47 U1.W19@-11878.39,11384.31
  BOTTOM w10: R157.1@-12799.14,10534.03 R151.1@-12741.14,10534.03 -12741.14,10496.14 -12727,10482 -12664,10482 -12649.14,10496.86 ; R154.1@-12798.86,10720.43 -12788.29,10731 -12706.07,10731 R155.1@-12695.86,10720.79 -12678.87,10703.8 C260.1@-12647.66,10703.8 -12633.8,10703.8 v5(-12624,10694) -12565,10694 -12552,10681 -12552,10505 ; R156.1@-12649.14,10533.55 -12649.14,10496.86 ; v7(-12627.66,11987.7) -12625.7,11985.74 U3.P3@-12625.7,11965.24 ; v7(-12606.02,11912.7) U3.M4@-12606.02,11925.87 U3.N4@-12606.02,11945.56 ; U3.P5@-12586.33,11965.24 v7(-12586.33,11986.7) ; U3.C6@-12566.65,11748.71 -12566.65,11761.77 v7(-12565.72,11762.7) ; v7(-12264.14,10496.86) v7(-12281.86,10496.86) -12543.86,10496.86 ; R210.1@-12133.15,12052.84 v7(-12133.15,12075.15) ; R146.1@-11645.29,10228.14 -11645.29,10232.71 v3(-11615,10263) ; v7(-11445,11541) R263.1@-11445,11560.54 ; v7(-11105,11423) -11097.71,11423 R110.1@-11029.14,11354.43 -11021,11346.29 C7.1@-11021,11317 U13.17@-10987,11317.05 ; v7(-11092,11233) -11108,11217 -11108,11168 -11061.36,11121.36 R235.1@-11058.43,11121.36 R234.1@-11058.43,11071.5 ; C7.1@-11021,11317 C6.1@-11021,11290 -11021,11257 C8.1@-11019.79,11257 ; R114.2@-11013.14,11181.99 -10976.18,11181.99 R115.2@-10976.14,11181.95 -10976.14,11175.14 v7(-10975,11174) ; v7(-11007,11601) -11008,11602 -11033.55,11602 -11043.55,11612 -11043.55,11641.87 -11043,11642.43 Q13.1@-11021.74,11663.69 ; R36.1@-10989.85,11655 -11013.05,11655 Q13.1@-11021.74,11663.69 ; R259.1@-10989.85,11738 -11013.05,11738 Q14.1@-11021.74,11746.69 -11045,11723.43 -11045,11686.95 Q13.1@-11021.74,11663.69 ; v7(-10917.58,11563.42) R113.2@-10898,11563.42 ; R116.2@-10779.79,11525 -10779.79,11562.54 R111.1@-10779.47,11562.86 v7(-10764.66,11577.67) ; R112.2@-10708.07,11299.14 -10708.07,11301.93 v7(-10702,11308) ; v3(-10576,10239) -10521,10239 -10485.84,10203.84 R207.1@-10402.21,10203.84 ; -12649.14,10496.86 -12560.14,10496.86 ; -12560.14,10496.86 -12552,10505 ; -12560.14,10496.86 -12543.86,10496.86 ; -12552,10505 -12543.86,10496.86
  BOTTOM w15: R168.1@-12879.84,11665.71 v14(-12875,11665.71) ; -12433,9884 -12422.38,9894.62 -12381.38,9894.62 -12362,9914 -12362,10062 ; v7(-12019.14,10872.9) R126.1@-12019.14,10875.37 ; Q8.1@-11441.66,12280.34 v7(-11441.66,12253.34) -11429.32,12241 -11386,12241 -11372.13,12227.13 R232.1@-11349.5,12227.13 ; Q9.1@-11222.66,12280.34 -11222.66,12252.84 -11222,12252.18 -11222,12252 -11212,12242 -11166.72,12242 -11151.85,12227.13 R233.1@-11129.5,12227.13 v7(-11129.5,12205.5) ; v3(-10986.94,10285.92) -10986.79,10286.07 R150.1@-10986.79,10301 ; v7(-10862.7,12088.3) R27.1@-10838.51,12088.3 R18.2@-10838.51,12049 ; v7(-10860.66,12166.34) R25.1@-10838.51,12166.34 R26.1@-10838.51,12127.52 ; R24.1@-10838.51,12205.16 v7(-10860,12205.16) -10879.82,12224.98 -10879.82,12271.18 -10869.2,12281.8 R23.1@-10838.51,12281.8 ; v7(-10611,11738) -10605.21,11743.79 R19.2@-10605.21,11759
  other v3: -11682,10369
  other v7: -11977,10729 -11997,10730 -12002,10758 -10317,11749 -10318,11766 -12132.71,11942.29 -12149,11945 -12660,12002
  other v14: -12306,10091 -12288,10091 -12271,10091 -12306,10109 -12288,10109 -12271,10109 -12306,10127 -12288,10127 -12271,10127
VDD_2V5: C46.1 FB4.1 TP25.1 U17.23 | length 103.2
  TOP w15: v8(-12959.34,11013.04) FB4.1@-12936.25,11013.04 ; TP25.1@-12736,9839 -12705.78,9839 -12703.78,9837 v8(-12673,9837)
  BOTTOM w4: C46.1@-12674.43,9821.34 -12674.43,9835.57 v8(-12673,9837)
  other v8: -12673,9855
VDD_3V3: C3.1 C4.1 C5.1 C55.1 C57.1 C65.1 C66.1 C67.1 C68.1 C69.1 C103.1 C113.1 C125.1 C134.1 C135.1 C206.1 C207.1 C208.1 C209.1 C210.1 C211.1 C212.1 C213.1 C238.1 C253.1 C255.1 C258.1 C259.1 C264.1 C266.1 C272.1 D21.1 D61.1 FB1.1 FB5.1 FB17.1 FB24.2 FB29.1 FB32.2 J7.3 J17.22 J18.2 L18.2 LED1.1 LED2.1 R21.1 R54.1 R60.1 R63.1 R122.1 R125.1 R134.1 R140.1 R142.1 R143.1 R144.1 R148.1 R160.1 R162.1 R169.1 R208.1 R209.1 R222.2 R228.1 R237.1 R238.1 R250.1 R254.1 R255.1 R260.2 TP26.1 U1.F15 U1.G14 U1.H9 U1.K10 U1.L18 U1.M19 U1.Y13 U3.E6 U3.F5 U3.J10 U3.K9 U10.7 U10.8 U13.3 U17.6 U17.22 U18.8 U20.4 U21.1 | length 3789.4
  TOP w8: v1(-12629.66,9806.34) C125.1@-12627.61,9806.34 ; C208.1@-12025.34,11408.85 -12018.94,11408.85 v8(-12014.09,11404)
  TOP w10: v8(-12601.34,11799.04) C67.1@-12601.34,11806.18 ; v8(-12573.66,11804.04) C68.1@-12565.56,11804.04 ; C65.1@-12514.86,11871.36 -12507.42,11871.36 v8(-12502.88,11866.82) ; C66.1@-12484.66,11851.88 -12484.66,11856.04 v8(-12473,11867.7) ; v8(-12468.5,9562.5) R54.1@-12468.5,9588.71 -12430.08,9588.71 R160.1@-12430,9588.79 ; v8(-12055,10124.34) C55.1@-12012.5,10124.34 -12013.38,10123.46 U10.8@-12013.38,10068.16 -12013.38,10037.38 -12009,10033 -12001,10033 -11993.68,10040.32 U10.7@-11993.68,10068.16 ; D61.1@-12016,9886.5 -11994.5,9886.5 v8(-11989,9881) ; C210.1@-11978.34,11129.2 -11977.47,11128.33 C272.1@-11977.47,11105.7 ; C213.1@-11882.34,11224.85 -11880.37,11224.85 v8(-11878.39,11226.83) -11877.18,11228.04 C211.1@-11857.5,11228.04 ; C264.1@-11796,10421 -11781,10421 v8(-11780,10422) -11780,10444.21 R162.1@-11790.79,10455 ; R63.1@-11671.79,10111.34 v8(-11646.34,10111.34) ; v1(-9928,9436) -9928,9455.98 LED2.1@-9927.76,9456.22 LED1.1@-9927.76,9487.86
  TOP w12: v8(-11671,11964) -11669.94,11962.94 FB29.1@-11669.94,11883.25 ; v8(-11159,11925) -11146.19,11912.19 R142.1@-11146.19,11892.16 ; R140.1@-10893.17,11891.44 -10893.17,11898.83 v8(-10877,11915) -10873.14,11915 -10861.14,11903 C253.1@-10861.14,11901.06 -10836.58,11901.06 TP26.1@-10827.21,11891.69 ; v8(-10498.86,12058.86) -10498.86,12000.86 -10489.85,11991.85 -10421.55,11991.85 -10411.4,12002 C255.1@-10411.4,12098.5 -10411.4,12170.52 J18.2@-10411.54,12170.66
  TOP w15: C113.1@-12341.65,9715.34 -12341.65,9731.35 v16(-12339,9734) ; R228.1@-12302.79,9874 v8(-12283,9874) ; v8(-11597.79,10937) R122.1@-11597.79,10960.21 ; C238.1@-11093.79,10385.66 FB24.2@-11093.83,10347.07 FB24.2@-11093.83,10347.07 v8(-11066,10347.07) ; J7.3@-10888.98,12005.04 -10888.98,11944.98 -10877,11933 v8(-10877,11915) ; v8(-10627,12062) -10623,12058 FB1.1@-10623,12038.21 ; R255.1@-10528.13,12058.86 v8(-10498.86,12058.86) R254.1@-10478.71,12058.86
  LYR3 w10: v16(-10021.42,10173) -10021.42,10126.58 -10063,10085 -10063,10003 -10179,9887 -10179,9732 -10268,9643 -10268,9462 -10215,9409 -9955,9409 v1(-9928,9436)
  LYR3 w15: v1(-12629.66,9806.34) -12610.66,9806.34 -12599,9818
  BOTTOM w4: FB5.1@-10514.43,11523.36 -10514.43,11536.57
  BOTTOM w6: v3(-12076.92,11185.85) U1.K10@-12055.56,11207.14 U1.K10@-12055.56,11207.14
  BOTTOM w8: v1(-12629.66,9806.34) -12628.65,9805.33 U17.22@-12605.18,9805.33 ; R260.2@-12113.96,10475 -12033,10475 v8(-12032,10474) ; v3(-12076.92,11185.85) -12076.92,11169.46 U1.H9@-12075.24,11167.78 ; v8(-12014.09,11404) U1.Y13@-11996.5,11404 ; U1.G14@-11976.82,11148.09 -11976.82,11142.68 -11977.84,11141.66 -11977.84,11130.33 v15(-11975.91,11128.4) U1.F15@-11957.13,11128.4 ; U1.L18@-11898.08,11226.83 v8(-11878.39,11226.83) U1.M19@-11878.39,11246.52
  BOTTOM w10: v8(-12601.34,11799.04) -12592.62,11807.76 U3.F5@-12586.33,11807.76 -12577.38,11807.76 v8(-12573.66,11804.04) -12566.65,11797.03 U3.E6@-12566.65,11788.08 ; U3.K9@-12507.59,11886.5 -12507.59,11871.53 v8(-12502.88,11866.82) U3.J10@-12487.91,11866.82 -12473.88,11866.82 v8(-12473,11867.7) ; C266.1@-11937.36,10664.34 -11919.66,10664.34 -11917,10667 v8(-11912,10667) ; v8(-11081.96,10846.54) FB17.1@-11081.96,10863.25 ; U13.3@-10789,11415.55 -10749.25,11415.55 -10748.8,11416 ; C4.1@-10748.8,11429.14 -10748.8,11416 ; C5.1@-10733.34,11371.49 -10743,11381.17 -10743,11396.86 C3.1@-10748.8,11402.66 -10748.8,11416 ; R222.2@-10707.14,11156.61 -10707.14,11168.86 v8(-10702,11174) ; R60.1@-10654.2,10519.75 -10635.25,10519.75 -10626,10529 v8(-10562,10529)
  BOTTOM w12: FB32.2@-11312.61,11927.42 -11308.42,11927.42 v8(-11303,11922) ; R237.1@-10021.42,10106.78 R238.1@-10021.42,10138.42 v16(-10021.42,10173)
  BOTTOM w15: v8(-11990,10475) -11990,10534.24 -11983.45,10540.79 R143.1@-11983.45,10563.14 -11983.41,10563.18 R144.1@-11983.41,10601.14 ; v8(-11912,10667) -11907,10667 -11905.94,10665.94 U20.4@-11895.47,10665.94 ; U18.8@-11790.66,10460.16 -11790.66,10432.66 v8(-11780,10422) ; v8(-11715.51,10602.49) -11715.51,10607.51 -11730.14,10622.14 R209.1@-11730.14,10633.99 -11706.21,10633.99 R148.1@-11683.84,10634.01 -11683.52,10634.33 R134.1@-11646.84,10634.33 ; v8(-11507.55,12263.55) R250.1@-11486.5,12263.55 ; v8(-11303,12203) -11303,12250.46 -11289.91,12263.55 R169.1@-11267.56,12263.55 ; R208.1@-11093,11878 -11085,11870 v8(-11072,11870) -11068.65,11870 -11060.65,11878 R125.1@-11054.42,11878 ; C5.1@-10733.34,11371.49 -10716.51,11371.49 v8(-10701,11387)
  other v8: -11990,10454 -12032,10455 -12011,10455 -10826,10461 -12011,10474 -10820,10476 -10829,10505 -11905,10622 -11886,10622 -11895,10638 -11910,10649 -10691,10686 -10688,10703 -10501,11560 -10501,11580 -10607,12064 -11349,12146 -11342,12177
  other v16: -12357,9735
VDD_3V3_EN: R137.2 U12.1 U17.17 | length 1227.6
  LYR3 w3.8: v1(-12605,9675) -12591.6,9675 -12562.6,9704 -12332,9704 -12317,9719 -12317,9981 -12353,10017 -12353,10349.23 v1(-12262,10440.23)
  BOTTOM w4: U17.17@-12605.18,9706.9 -12611.1,9706.9 -12616,9702 -12616,9686 v1(-12605,9675) ; v1(-12262,10440.23) R137.2@-12224.86,10440.23 -12194.86,10410.23 -12194.86,10402.71 -12188.35,10396.2 U12.1@-12188.35,10389.31
VDD_3V3_PG: R138.2 TP19.1 U12.2 | length 87.9
  TOP w4: TP19.1@-12193,10467 -12186.86,10460.86 v5(-12186.86,10440.14)
  BOTTOM w4: v5(-12186.86,10440.14) R138.2@-12186.86,10440.19 -12168.66,10421.99 U12.2@-12168.66,10389.31
VDD_3V3_SD: C51.1 C77.1 C78.1 C79.1 J1.4 U21.5 U21.6
  other v7: -10780,10772 -10762,10772 -10597,10925 -10614,10926
VDD_3V3A: C56.1 C232.1 C233.1 FB17.2 U11.2 | length 166.1
  BOTTOM w10: C233.1@-11044.64,10899.27 -11016.51,10899.27 -11015.51,10898.27 -11014.76,10898.27 -11005.6,10889.11 C56.1@-11005.6,10888.36 -11005.48,10888.24 C232.1@-11005.48,10861.36 -11005.48,10839.92 -11005.83,10839.57 U11.2@-11005.83,10803.98
  BOTTOM w15: FB17.2@-11081.96,10899.67 -11081.56,10899.27 C233.1@-11044.64,10899.27
VDD_CANUART: C145.1 C146.1 C147.1 FB6.2 U1.F8 | length 26
  TOP w10: v5(-12113.49,11128.4) -12111.97,11129.92 C146.1@-12106.66,11129.92
  BOTTOM w8: v5(-12113.49,11128.4) U1.F8@-12094.92,11128.4
VDD_CORE: C50.1 C176.1 C177.1 C179.1 C180.1 C181.1 C182.1 C183.1 C184.1 C185.1 C186.1 C187.1 C188.1 C189.1 C190.1 C191.1 C192.1 C193.1 C194.1 C203.1 FB6.1 FB7.1 FB8.1 L14.2 R123.2 TP18.1 U1.H8 U1.J11 U1.J14 U1.K17 U1.L12 U1.L15 U1.M16 U1.N8 U1.N11 U1.N13 U1.P17 U1.R11 U1.R14 U1.U12 U1.V8 U1.V15 U1.V17 | length 805.1
  TOP w4: v7(-12236,9917) -12235,9917 TP18.1@-12221,9931
  TOP w10: C193.1@-12105.53,11382.72 -12098.39,11382.72 v3(-12097.41,11383.7) -12098.34,11384.63 C181.1@-12098.34,11407.85 ; C194.1@-12099.34,11156.85 -12099.34,11154.2 v7(-12094.92,11149.78) ; C185.1@-12039.66,11194.55 -12039.66,11204.49 -12039,11205.15 v7(-12039,11207) -12037.85,11207 -12027.85,11217 C189.1@-12027.85,11224.04 -12027.85,11235.67 v7(-12037.01,11244.83) -12031.8,11250.04 C187.1@-12029.85,11250.04 ; v14(-12037.01,11325.26) -12033.85,11328.42 C192.1@-12033.85,11334.04 ; C180.1@-11987.66,11196.55 -11982.95,11196.55 v7(-11976,11203.5) -11970.95,11208.55 C183.1@-11961.66,11208.55 ; v14(-11939.1,11344.94) -11923.19,11360.85 C190.1@-11922.34,11360.85 ; C188.1@-11938.85,11224.04 -11938.85,11240.04 C184.1@-11928.85,11250.04 ; v7(-11917.1,11267.11) C186.1@-11909.36,11274.85
  TOP w15: R123.2@-12300,9835.21 -12269.79,9835.21 -12249.44,9855.56 -12249.44,9865.56 v7(-12236,9879) v7(-12236,9898) ; v7(-12189,10809) -12189,10815 -12188.21,10815.79 FB6.1@-12188.21,10845.04 ; FB8.1@-11977.87,11709.36 v14(-11977.87,11745.7)
  BOTTOM w6: v7(-12039,11207) -12029.1,11216.9 -12027.25,11216.9 -12025.81,11218.34 -12024.67,11218.34 U1.L12@-12016.18,11226.83 ; v14(-12037.01,11325.26) -12035.16,11327.11 -12035.16,11328.54 -12018.76,11344.94 U1.U12@-12016.18,11344.94 ; v7(-11939.1,11226.83) -11938.38,11226.11 -11938.38,11225.41 -11920.11,11207.14 U1.K17@-11917.76,11207.14 ; v14(-11939.1,11344.94) -11939.1,11345.57 -11920.05,11364.62 U1.V17@-11917.76,11364.62
  BOTTOM w8: v3(-12097.41,11383.7) -12094.92,11381.21 U1.V8@-12094.92,11364.62 ; v7(-12094.92,11149.78) U1.H8@-12094.92,11167.78 ; U1.N8@-12094.92,11266.2 -12077.5,11266.2 v7(-12077,11266.7) ; v7(-12039,11207) -12036.4,11204.4 -12036.4,11187.99 U1.J11@-12035.87,11187.46 ; v7(-12037.01,11244.83) -12037.01,11265.06 U1.N11@-12035.87,11266.2 ; v14(-12037.01,11325.26) -12037.01,11306.71 U1.R11@-12035.87,11305.57 ; U1.N13@-11996.5,11266.2 -11996.35,11266.2 -11978.4,11284.15 v7(-11978.4,11285.73) -11976.82,11287.31 U1.R14@-11976.82,11305.57 ; U1.J14@-11976.82,11187.46 -11977.4,11188.04 -11977.4,11202.1 v7(-11976,11203.5) ; U1.L15@-11957.13,11226.83 v7(-11939.1,11226.83) -11937.44,11228.49 U1.M16@-11937.44,11246.52 ; U1.V15@-11957.13,11364.62 -11939.1,11346.59 v14@-11939.1,11345.57 ; U1.P17@-11917.76,11285.88 -11917.76,11267.77 v7(-11917.1,11267.11)
  other v3: -11865,11739 -11856,11755
  other v7: -12217,9879 -12200,9879 -12218,9898 -12200,9898 -12199,9917 -12218,9918 -12237,9937 -12219,9939 -12198,9939 -12228,10727 -12207,10727 -12195,10759 -12222,10782
  other v14: -11966,11758
VDD_SD: C49.1 FB9.1 R73.1 R74.1 R75.1 R76.1 R77.1 R78.1 TP22.1 U17.7 | length 3293.5
  TOP w20: C49.1@-12403.55,9687.66 v5(-12383.66,9687.66) -12378,9682 -12243,9682 ; TP22.1@-12245,9721 -12245,9712 -12243,9710 -12243,9682 ; v1(-12206,9665) -12223,9682 -12243,9682
  LYR3 w20: v1(-12206,9665) -12117,9754 -12117,9862 -12005,9974 -12005,10196 -11863.3,10337.7 -11863.3,10444.21 -11793.86,10513.65 v1(-11793.86,10858.85)
  BOTTOM w8: U17.7@-12416.2,9726.59 -12394.59,9726.59 -12390,9722
  BOTTOM w15: -12390,9722 -12383.66,9715.66 v5(-12383.66,9687.66)
  BOTTOM w20: v1(-11793.86,10858.85) -11793.86,10813.87 -11748.99,10769 -11332.9,10769 -11171.9,10930 -10808.99,10930 -10761.85,10977.14 -10698,10977.14 ; R73.1@-10655.21,10777.74 R74.1@-10655.21,10815.04 R75.1@-10655.21,10852.76 -10683,10880.55 -10683,10962.14 ; R77.1@-10655.21,11052.04 R76.1@-10655.21,11014.28 R78.1@-10655.21,10977.14 -10668,10977.14 ; -10698,10977.14 -10682,10977.14 ; -10698,10977.14 -10683,10962.14 ; -10683,10962.14 -10668,10977.14 ; -10683,10962.14 -10683,10976.14 -10682,10977.14 ; -10682,10977.14 -10668,10977.14
VDDA_0V85: C48.1 C132.1 C178.1 C195.1 C196.1 C197.1 C198.1 C199.1 C200.1 C201.1 C202.1 TP23.1 U1.J12 U1.K16 U1.N12 U1.N14 U1.P16 U1.R12 U1.T10 U1.U14 U17.19 | length 255.7
  TOP w10: C196.1@-12032.85,11276.04 -12032.85,11283.35 v8(-12037,11287.5) -12031.85,11292.65 C195.1@-12031.85,11302.04 ; v8(-12014.5,11206.41) -12013.66,11205.57 C202.1@-12013.66,11196.55 ; C198.1@-11998.34,11357.85 -11998.34,11349.04 v8(-11994.24,11344.94)
  TOP w15: TP23.1@-12678.34,9703.31 v8(-12678.34,9720.66)
  BOTTOM w6: U1.N14@-11976.82,11266.2 -11974.16,11266.2 -11956.34,11248.38 v8(-11956.34,11244.82)
  BOTTOM w8: v8(-12055.56,11306.7) U1.T10@-12055.56,11325.26 ; U1.N12@-12016.18,11266.2 -12018.2,11266.2 -12021.38,11269.38 v8(-12037,11287.5) -12035.75,11288.04 -12018.22,11305.57 U1.R12@-12016.18,11305.57 ; v8(-11994.24,11344.94) U1.U14@-11976.82,11344.94 ; v8(-11956.34,11285.88) U1.P16@-11937.44,11285.88 ; v8(-11937.44,11188.02) U1.K16@-11937.44,11207.14
  BOTTOM w10: U1.J12@-12016.18,11187.46 -12016.18,11204.73 v8(-12014.5,11206.41)
  other v8: -12655,9722 -12677,9739 -12059,10568 -12040,10568 -12059,10586 -12040,10586
VDDA_1V8: C47.1 C205.1 FB10.1 FB11.1 FB12.1 FB13.1 FB14.1 FB15.1 FB16.1 TP24.1 U1.G7 U1.G16 U1.T9 U17.21 | length 421.1
  TOP w4: TP24.1@-12679.97,9785.31 -12676.44,9785.31 v8(-12675.47,9784.34)
  TOP w10: C205.1@-12125.34,11175.74 -12124.04,11175.74 v15(-12116,11167.7)
  TOP w20: v15(-12428,10615) -12378,10565 -12182,10565 -12161.25,10585.75 FB13.1@-12161.25,10634.14
  BOTTOM w8: v15(-12116,11167.7) -12114.61,11166.31 U1.G7@-12114.61,11148.09 ; v3(-12076.92,11307.17) -12076.92,11311.39 -12075.24,11313.07 U1.T9@-12075.24,11325.26 ; v3(-11939.1,11128.7) -11939.1,11131.11 -11937.44,11132.77 U1.G16@-11937.44,11148.09
  other v3: -11658,10498 -11657.62,10515.87
  other v8: -12659,9775 -12646,9788
  other v15: -12429,10634
VDDA_1V8_CSIRX: C170.1 C171.1 C172.1 FB15.2 U1.W14 | length 23
  TOP w10: C171.1@-11975.34,11406.52 -11975.34,11402.48 v8(-11975.16,11402.3)
  BOTTOM w8: U1.W14@-11976.82,11384.31 -11976.82,11400.64 v8(-11975.16,11402.3)
  other v8: -11940,11617.7
VDDA_1V8_MCU: C164.1 C165.1 C166.1 FB13.2 U1.L11 | length 19.4
  BOTTOM w10: v1(-12054.92,11226.83) -12054.49,11226.4 -12036.3,11226.4 U1.L11@-12035.87,11226.83
  other v1: -12207.34,10694.34
VDDA_1V8_OLDI: C167.1 C168.1 C169.1 FB14.2 U1.W9 U1.W10 | length 125.2
  TOP w8: C168.1@-12079.66,11388.88 -12079.66,11399.18 v7(-12076.93,11401.91) ; v7(-12054.93,11401.71) -12054.66,11401.44 C167.1@-12054.66,11388.55
  TOP w10: C169.1@-12133.15,11639.36 -12133.15,11620.15 v7(-12103,11590)
  BOTTOM w8: v7(-12076.93,11401.91) -12075.24,11400.22 U1.W9@-12075.24,11384.31 ; U1.W10@-12055.56,11384.31 -12055.56,11401.08 v7(-12054.93,11401.71)
VDDA_1V8_USB: C173.1 C174.1 C175.1 FB16.2 U1.Y11 | length 53.4
  TOP w8: C174.1@-12073.34,11441.52 -12072.74,11441.52 v3(-12053.96,11422.74)
  BOTTOM w4: v3(-12053.96,11422.74) -12044.32,11413.1 -12044.32,11412.45 U1.Y11@-12035.87,11404
  other v3: -12061.25,11615.7
VDDA_CORE_CSI: C148.1 C149.1 C150.1 FB7.2 U1.W13 | length 139.2
  TOP w10: C150.1@-11869.49,11672.04 -11870.85,11670.68 C148.1@-11870.85,11639.04 -11870.85,11622.79 -11860.76,11612.7 v1(-11852,11612.7)
  TOP w15: FB7.2@-11869.89,11709.36 -11869.49,11708.96 C150.1@-11869.49,11672.04
  BOTTOM w4: U1.W13@-11996.5,11384.31 -11978.5,11366.31 v1(-11978.5,11362.87)
VDDA_CORE_USB: C151.1 C152.1 C153.1 FB8.2 U1.W12 | length 20.3
  BOTTOM w8: v3(-12036.5,11384.31) U1.W12@-12016.18,11384.31
  other v3: -12019,11653.7
VDDA_PLL0: C155.1 C156.1 C157.1 FB10.2 U1.U11 | length 45.3
  TOP w10: v7(-12229,11621.2) -12226.7,11623.5 C157.1@-12226.7,11639.36 ; C156.1@-12057.78,11341.36 -12057.78,11343.77 v7(-12054.92,11346.63)
  BOTTOM w10: v7(-12054.92,11346.63) -12037.56,11346.63 U1.U11@-12035.87,11344.94
VDDA_PLL1: C158.1 C159.1 C160.1 FB11.2 U1.U15 | length 18.4
  BOTTOM w10: U1.U15@-11957.13,11344.94 -11957.13,11327.67 v8(-11956.34,11326.88)
  other v8: -11704,11348
VDDA_PLL2: C161.1 C162.1 C163.1 FB12.2 U1.L14 | length 42
  TOP w10: -11552.54,11056.54 C161.1@-11532.22,11056.54
  BOTTOM w8: v1(-11978.4,11247.81) -11976.82,11246.23 U1.L14@-11976.82,11226.83
  other v1: -11594,11135
VDDA_SYS_MON: R139.2 R141.1 U1.H10 | length 802.7
  LYR3 w3.8: v1(-12305,10694) -12305,10749 -12127,10927 -12127,11019 -12067,11079 -12067,11117 -12061.9,11122.1 -12061.9,11177.36 v1(-12055.56,11183.7)
  BOTTOM w4: v1(-12305,10694) -12250,10639 -12250,10596.37 R141.1@-12224.86,10571.23 -12208.01,10571.23 -12207.73,10571.51 R139.2@-12187.14,10571.51 ; U1.H10@-12055.56,11167.78 v1(-12055.56,11183.7)
VDDRF: C24.1 C42.1 C43.1 L3.1 U9.45 U9.48 | length 138.1
  BOTTOM w10: U9.48@-10105.39,11273.51 -10076.51,11273.51 -10068.64,11265.64 v3(-10068.64,11242.36) C43.1@-10068.64,11230.4 ; U9.45@-10105.39,11332.57 -10063.43,11332.57 v3(-10056.64,11339.36) C42.1@-10045.32,11339.36
  other v3: -10345,11586 -10346,11602
VDDSHV5: C154.1 FB9.2 U1.G17 | length 48.2
  TOP w10: v1(-11917.1,11129.61) -11915.62,11129.61 -11897.85,11111.84 C154.1@-11897.85,11109.04
  BOTTOM w8: U1.G17@-11917.76,11148.09 -11917.76,11130.27 v1(-11917.1,11129.61)
  other v1: -11795,10897.79
VOUT0_D0: U1.U22 U7.61 | length 1646.4
  LYR3 w3.8: v10(-11272.97,11475) -11272.97,11438.07 -11241.8,11406.9 -11241.8,10697.84 -11230,10686.04 -11230,10516.07 v1(-11222.65,10508.72)
  LAY6 w3.8: -11697,11394.9 -11292.69,11394.9 -11272.97,11414.62 v10(-11272.97,11475)
  LAY6 w4: v3(-11800.75,11361.44) -11800.43,11361.76 -11785.24,11361.76 -11752.1,11394.9 -11697,11394.9
  BOTTOM w4: U1.U22@-11819.34,11344.94 -11805.28,11359 -11804,11359 -11803,11360 -11802.51,11360 -11801.07,11361.44 v3(-11800.75,11361.44) ; v1(-11222.65,10508.72) U7.61@-11222.65,10532.4
VOUT0_D1: U1.V24 U7.60 | length 1581.3
  LYR3 w3.8: v1(-11286.87,11457.5) -11286.87,11440.93 -11249.6,11403.66 -11249.6,10694.6 -11242.33,10687.33 v1(-11242.33,10493)
  BOTTOM w3.2: U1.V24@-11779.96,11364.62 -11770.16,11374.42 -11753.58,11374.42 -11750.49,11377.51 -11728.78,11377.51 -11728.47,11377.2 -11724,11377.2
  BOTTOM w4: -11724,11377.2 -11332.88,11377.2 -11310.08,11400 -11298.09,11400 -11286.87,11411.22 v1(-11286.87,11457.5) ; v1(-11242.33,10493) U7.60@-11242.33,10532.4
VOUT0_D2: U1.W25 U7.59 | length 1564
  LYR3 w3.8: v1(-11301.8,11474.8) -11301.8,11444.82 -11257.4,11400.42 -11257.4,10715.68 -11293,10680.08 -11293,10550 -11262.02,10519.02 v1(-11262.02,10508.72)
  BOTTOM w4: U1.W25@-11760.28,11384.31 -11759.39,11385.2 -11336.2,11385.2 -11301.8,11419.6 v1(-11301.8,11474.8) ; v1(-11262.02,10508.72) U7.59@-11262.02,10532.4
VOUT0_D3: U1.W24 U7.58 | length 1562.8
  LYR3 w3.8: v1(-11317.1,11458.1) -11317.1,11449.08 -11265.2,11397.18 -11265.2,10718.92 -11305,10679.12 -11305,10543 -11281.7,10519.7 v1(-11281.7,10493)
  BOTTOM w3.2: U1.W24@-11779.96,11384.31 -11770.16,11394.11 -11722.2,11394.11
  BOTTOM w4: -11722.2,11394.11 -11351.59,11394.11 -11317.1,11428.6 v1(-11317.1,11458.1) ; v1(-11281.7,10493) U7.58@-11281.7,10532.4
VOUT0_D4: U1.Y25 U7.57 | length 1521.3
  LYR3 w3.8: v1(-11332.7,11474.7) -11332.7,11453.64 -11273,11393.94 -11273,10722.16 -11322,10673.16 -11322,10529.33 v1(-11301.39,10508.72)
  BOTTOM w4: U1.Y25@-11760.28,11404 -11367.2,11404 -11332.7,11438.5 v1(-11332.7,11474.7) ; v1(-11301.39,10508.72) U7.57@-11301.39,10532.4
VOUT0_D5: U1.Y24 U7.55 | length 1494.5
  LYR3 w3.8: v1(-11348.08,11460.9) -11348.08,11457.98 -11280.8,11390.7 -11280.8,10725.4 -11340.76,10665.44 v1(-11340.76,10508.72)
  BOTTOM w3.2: U1.Y24@-11779.96,11404 -11770.08,11413.88 -11725.82,11413.88
  BOTTOM w4: -11725.82,11413.88 -11377.22,11413.88 -11348.1,11443 v1(-11348.08,11460.9) ; v1(-11340.76,10508.72) U7.55@-11340.76,10532.4